# EAGLE board FIXED (EAGLE 9.7.0)
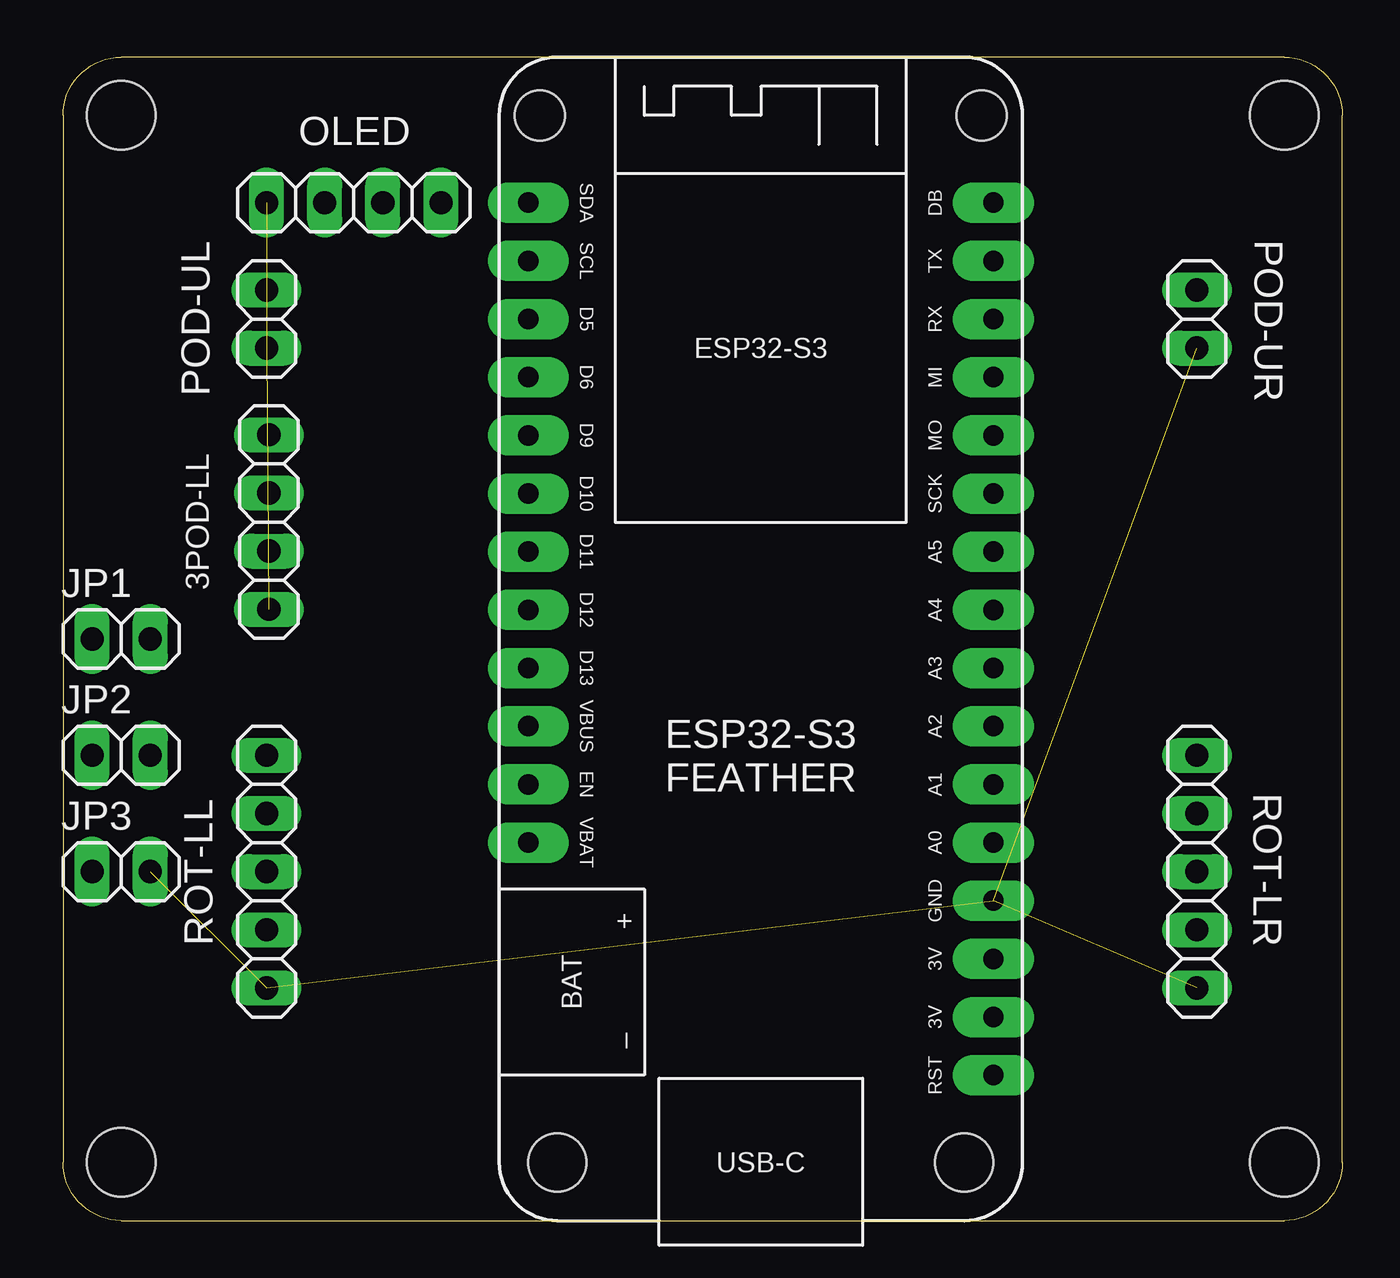
[diagram p0: board, top side]
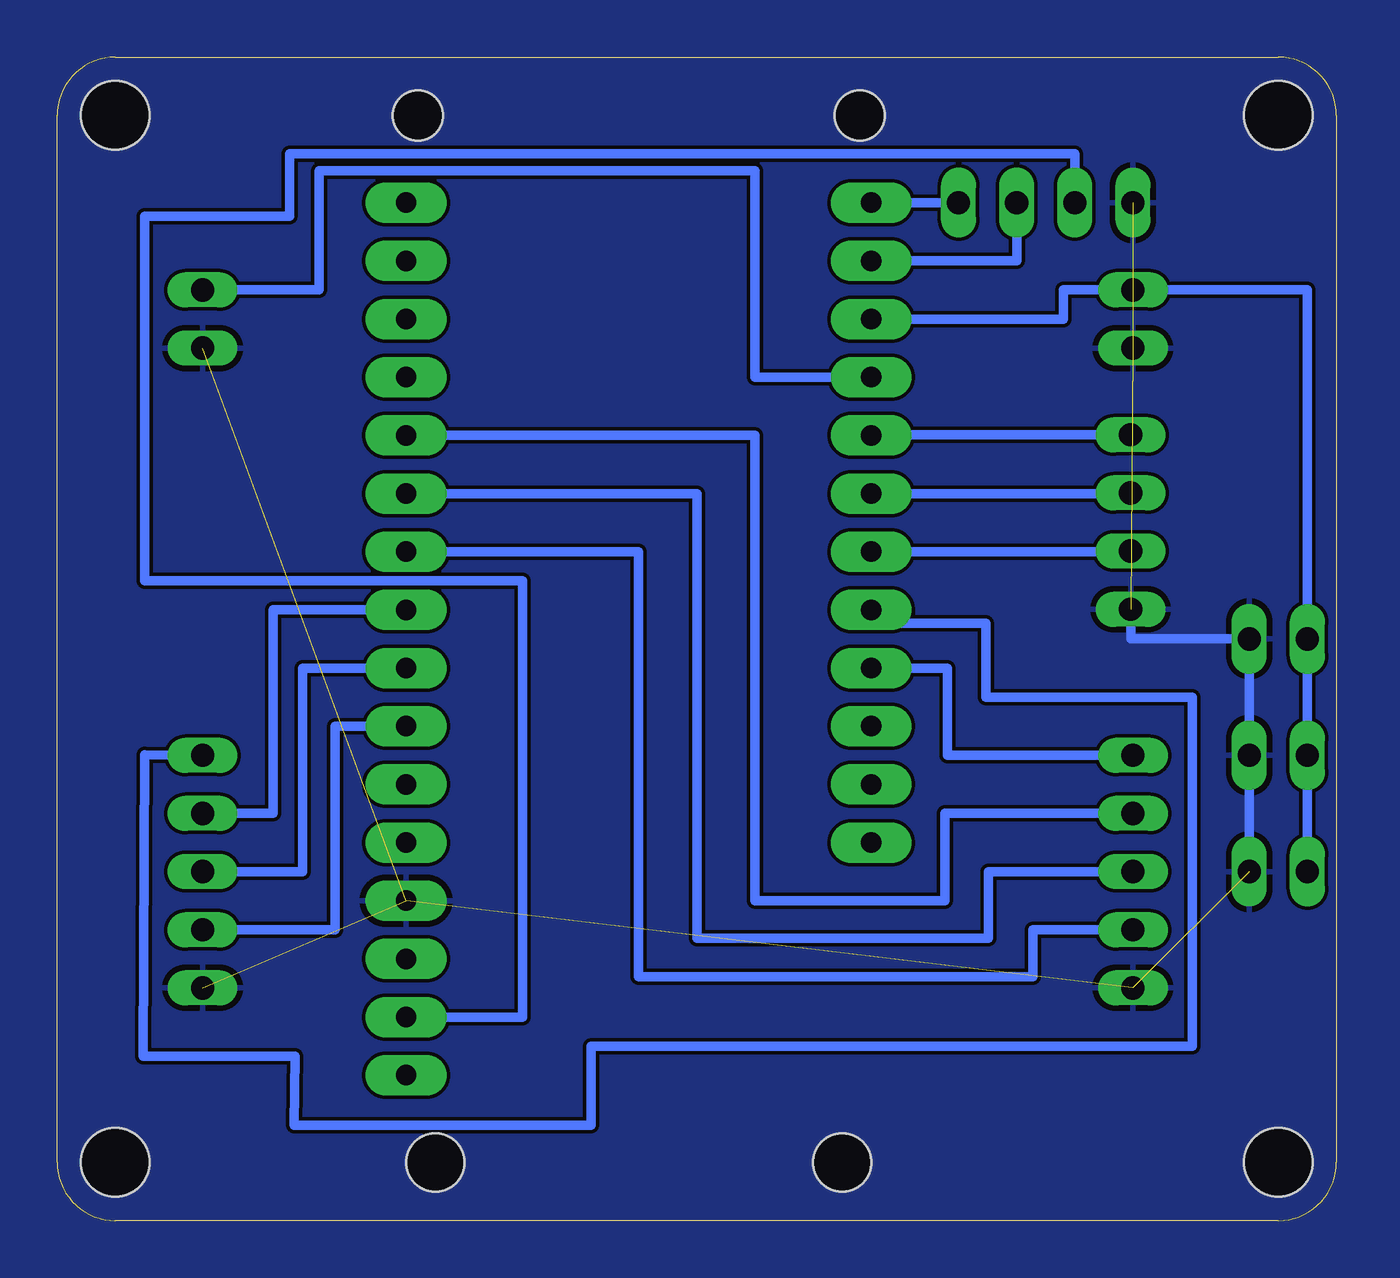
[diagram p1: board, bottom side, seen from below]

Size 55.88 x 50.8 mm. Coordinates in mm from the lower left corner, seen from the top.
Outline: 2.54,0 53.34,0 arc90 55.88,2.54 55.88,48.26 arc90 53.34,50.8 2.54,50.8 arc90 0,48.26 0,2.54 arc90 2.54,0
Copper layers (1*16): Top 0.035mm / dielectric 1.5mm / Bottom 0.035mm
Design rules "Fusion Electronics Design Rules": minimum track width 6mil, minimum drill 0.35mm, track to track 6mil, track to pad 6mil, pad to pad 6mil, via to via 6mil, smd to smd 6mil, copper to edge 0mil, drill to drill 6mil, minimum pad ring 10mil, minimum via ring 8mil, stop-mask expansion 4mil, vias tented up to drill 9999mil, thermal gap 10mil
Holes 3 mm at 53.34,48.26 2.54,48.26 2.54,2.54 53.34,2.54

## Footprints (pad centres in the part's own frame; a part is rotated, then mirrored left to right if it is on the bottom)
1X04 = drill 1.016 long: 1 -3.81,0; 2 -1.27,0; 3 1.27,0; 4 3.81,0
ESP32-S3_FEATHER = drill 0.889 pad 1.778 long: 3V_1 -10.16,16.51; 3V_2 -10.16,13.97; A0 -10.16,8.89; A1 -10.16,6.35; A2 -10.16,3.81; A3 -10.16,1.27; A4 -10.16,-1.27; A5 -10.16,-3.81; D5 10.16,-13.97; D6 10.16,-11.43; D9 10.16,-8.89; D10 10.16,-6.35; D11 10.16,-3.81; D12 10.16,-1.27; D13 10.16,1.27; DB -10.16,-19.05; EN 10.16,6.35; GND -10.16,11.43; MI -10.16,-11.43; MO -10.16,-8.89; RST -10.16,19.05; RX -10.16,-13.97; SCK -10.16,-6.35; SCL 10.16,-16.51; SDA 10.16,-19.05; TX -10.16,-16.51; VBAT 10.16,8.89; VBUS 10.16,3.81 | hole 2.54: -8.89,22.86; 8.89,22.86 | hole 2.2: -9.652,-22.86; 9.652,-22.86
1X02 = drill 1.016 long: 1 -1.27,0; 2 1.27,0
1X05 = drill 1.016 long: 1 -5.08,0; 2 -2.54,0; 3 0,0; 4 2.54,0; 5 5.08,0

## Placement (x,y rotation side)
3POD-LL  [1X04]  8.99,30.51 270 top
BP07-R  ESP32-S3_FEATHER  [ESP32-S3_FEATHER]  30.48,25.4 180 top
JP1  [1X02]  2.54,25.4 0 top
JP2  [1X02]  2.54,20.32 0 top
JP3  [1X02]  2.54,15.24 0 top
OLED  [1X04]  12.7,44.45 0 top
POD-UL  [1X02]  8.89,39.37 270 top
POD-UR  [1X02]  49.53,39.37 270 top
ROT-LL  [1X05]  8.89,15.24 270 top
ROT-LR  [1X05]  49.53,15.24 270 top

## Library data of the parts
3POD-LL JP1-JP3 OLED POD-UL POD-UR ROT-LL ROT-LR = pinhead-2
BP07-R = ESP32-S3 Feather

## Nets
+3.3V: BP07-R.3V_1 OLED.2
BP01: BP07-R.D5 JP1.1 JP2.1 JP3.1 POD-UL.1
BP02: BP07-R.D6 POD-UR.1
BP03: 3POD-LL.1 BP07-R.D9
BP04: 3POD-LL.2 BP07-R.D10
BP05: 3POD-LL.3 BP07-R.D11
BP06-L: BP07-R.D13 ROT-LL.1
BP06-R: BP07-R.D12 ROT-LR.1
BP07-L: BP07-R.A5 ROT-LL.4
BP07-R: BP07-R.A2 ROT-LR.4
ENC-A-L: BP07-R.MO ROT-LL.2
ENC-A-R: BP07-R.A4 ROT-LR.2
ENC-B-L: BP07-R.SCK ROT-LL.3
ENC-B-R: BP07-R.A3 ROT-LR.3
GND: 3POD-LL.4 BP07-R.GND JP1.2 JP2.2 JP3.2 OLED.1 POD-UL.2 POD-UR.2 ROT-LL.5 ROT-LR.5
SCL: BP07-R.SCL OLED.3
SDA: BP07-R.SDA OLED.4

## Tracks (layer width: path | path; a pad name or v marks a point on that pad's centre or on a via)
+3.3V
  Bottom 0.406: OLED.2 11.43,46.58 45.72,46.58 45.72,43.87 52.07,43.87 52.07,27.94 35.56,27.94 35.56,8.89 BP07-R.3V_1
BP01
  Bottom 0.406: BP07-R.D5 11.94,39.37 11.94,40.64 POD-UL.1 1.27,40.64 JP1.1 JP2.1 JP3.1
BP02
  Bottom 0.406: BP07-R.D6 25.4,36.83 25.4,45.85 44.45,45.85 44.45,40.64 POD-UR.1
BP03
  Bottom 0.406: 3POD-LL.1 20.3,34.31 BP07-R.D9
BP04
  Bottom 0.406: BP07-R.D10 9.02,31.75 3POD-LL.2
BP05
  Bottom 0.406: BP07-R.D11 9.02,29.21 3POD-LL.3
BP06-L
  Bottom 0.406: ROT-LL.1 16.99,20.32 16.99,24.13 BP07-R.D13
BP06-R
  Bottom 0.406: 19.74,26.09 15.32,26.09 15.32,22.86 6.3,22.86 6.3,7.62 32.56,7.62 32.56,4.15 45.52,4.16 45.49,7.18 52.12,7.18 52.07,20.34 ROT-LR.1
  Bottom 0.61: BP07-R.D12 19.74,26.09
BP07-L
  Bottom 0.406: ROT-LL.4 13.26,12.7 13.26,10.64 30.48,10.64 30.48,29.21 BP07-R.A5
BP07-R
  Bottom 0.406: BP07-R.A2 43.74,21.59 43.74,12.7 ROT-LR.4
ENC-A-L
  Bottom 0.406: ROT-LL.2 17.09,17.78 17.09,13.97 25.4,13.97 25.4,34.29 BP07-R.MO
ENC-A-R
  Bottom 0.406: BP07-R.A4 46.46,26.67 46.46,17.78 ROT-LR.2
ENC-B-L
  Bottom 0.406: ROT-LL.3 15.21,15.24 15.21,12.32 27.94,12.32 27.94,31.75 BP07-R.SCK
ENC-B-R
  Bottom 0.406: BP07-R.A3 45.16,24.13 45.16,15.24 ROT-LR.3
GND  (6 unrouted)
  Bottom 0.406: JP3.2 JP2.2 JP1.2 8.99,25.4 3POD-LL.4
  pour Bottom: -3.73,-3.73 63.47,-3.73 64.69,-2.51 64.69,55.8 -3.73,55.8
SCL
  Bottom 0.406: OLED.3 13.97,41.91 BP07-R.SCL
SDA
  Bottom 0.406: OLED.4 BP07-R.SDA